# EAGLE board SOIC-24-panel-4x1 (EAGLE 5.00)
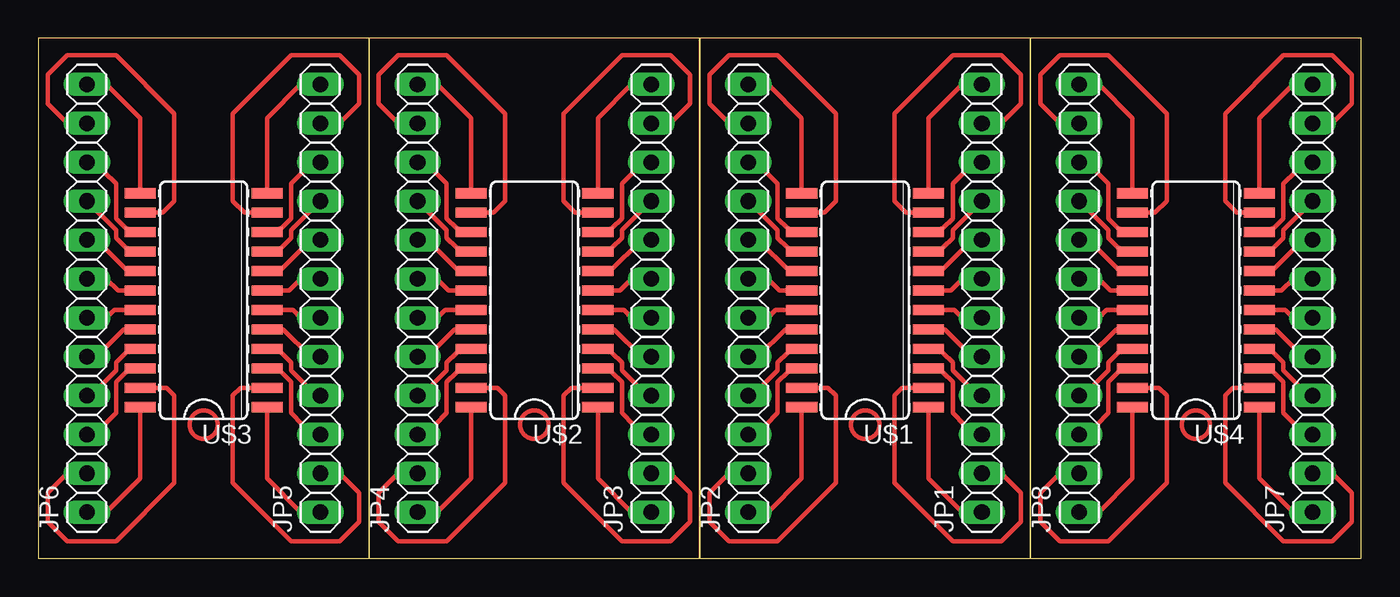
[diagram p0: board, top side]

Size 86.35 x 33.96 mm. Coordinates in mm from the lower left corner, seen from the top.
Outline: 64.76,0 64.76,33.96 43.18,33.96 43.18,0 64.76,0
Outline: 43.17,0 43.17,33.96 21.59,33.96 21.59,0 43.17,0
Outline: 21.58,0 21.58,33.96 0,33.96 0,0 21.58,0
Outline: 86.35,0 86.35,33.96 64.77,33.96 64.77,0 86.35,0
Copper layers (1*16): Top 0.035mm / dielectric 1.5mm / Bottom 0.035mm
Design rules "default": minimum track width 10mil, minimum drill 24mil, track to track 8mil, track to pad 8mil, pad to pad 8mil, via to via 8mil, smd to smd 8mil, copper to edge 40mil, drill to drill 8mil, minimum pad ring 10mil, minimum via ring 8mil, stop-mask expansion 4mil, vias tented up to drill 0mil, thermal gap 10mil

## Footprints (pad centres in the part's own frame; a part is rotated, then mirrored left to right if it is on the bottom)
1X12 = drill 1.016 long: 1 -13.97,0; 2 -11.43,0; 3 -8.89,0; 4 -6.35,0; 5 -3.81,0; 6 -1.27,0; 7 1.27,0; 8 3.81,0; 9 6.35,0; 10 8.89,0; 11 11.43,0; 12 13.97,0
SOIC-24 = smd 0.66 x 2.032: 1 -6.985,-4.14; 2 -5.715,-4.14; 3 -4.445,-4.14; 4 -3.175,-4.14; 5 -1.905,-4.14; 6 -0.635,-4.14; 7 0.635,-4.14; 8 1.905,-4.14; 9 3.175,-4.14; 10 4.445,-4.14; 11 5.715,-4.14; 12 6.985,-4.14; 13 6.985,4.14; 14 5.715,4.14; 15 4.445,4.14; 16 3.175,4.14; 17 1.905,4.14; 18 0.635,4.14; 19 -0.635,4.14; 20 -1.905,4.14; 21 -3.175,4.14; 22 -4.445,4.14; 23 -5.715,4.14; 24 -6.985,4.14

## Placement (x,y rotation side)
JP1  [1X12]  61.59,16.98 90 top
JP2  [1X12]  46.35,16.98 90 top
JP3  [1X12]  40,16.98 90 top
JP4  [1X12]  24.76,16.98 90 top
JP5  [1X12]  18.41,16.98 90 top
JP6  [1X12]  3.17,16.98 90 top
JP7  [1X12]  83.18,16.98 90 top
JP8  [1X12]  67.94,16.98 90 top
U$1  SOIC-24  [SOIC-24]  53.97,16.85 90 top
U$2  SOIC-24  [SOIC-24]  32.38,16.85 90 top
U$3  SOIC-24  [SOIC-24]  10.79,16.85 90 top
U$4  SOIC-24  [SOIC-24]  75.56,16.85 90 top

## Library data of the parts
JP1-JP8 = pinhead
U$1-U$4 = smd

## Nets
N$1: JP1.1 U$1.1
N$2: JP1.2 U$1.2
N$3: JP1.3 U$1.3
N$4: JP1.4 U$1.4
N$5: JP1.5 U$1.5
N$6: JP1.6 U$1.6
N$7: JP1.7 U$1.7
N$8: JP1.8 U$1.8
N$9: JP1.9 U$1.9
N$10: JP1.10 U$1.10
N$11: JP1.11 U$1.11
N$12: JP1.12 U$1.12
N$13: JP2.1 U$1.24
N$14: JP2.2 U$1.23
N$15: JP2.3 U$1.22
N$16: JP2.4 U$1.21
N$17: JP2.5 U$1.20
N$18: JP2.6 U$1.19
N$19: JP2.7 U$1.18
N$20: JP2.8 U$1.17
N$21: JP2.9 U$1.16
N$22: JP2.10 U$1.15
N$23: JP2.11 U$1.14
N$24: JP2.12 U$1.13
N$25: JP3.1 U$2.1
N$26: JP3.2 U$2.2
N$27: JP3.3 U$2.3
N$28: JP3.4 U$2.4
N$29: JP3.5 U$2.5
N$30: JP3.6 U$2.6
N$31: JP3.7 U$2.7
N$32: JP3.8 U$2.8
N$33: JP3.9 U$2.9
N$34: JP3.10 U$2.10
N$35: JP3.11 U$2.11
N$36: JP3.12 U$2.12
N$37: JP4.1 U$2.24
N$38: JP4.2 U$2.23
N$39: JP4.3 U$2.22
N$40: JP4.4 U$2.21
N$41: JP4.5 U$2.20
N$42: JP4.6 U$2.19
N$43: JP4.7 U$2.18
N$44: JP4.8 U$2.17
N$45: JP4.9 U$2.16
N$46: JP4.10 U$2.15
N$47: JP4.11 U$2.14
N$48: JP4.12 U$2.13
N$49: JP5.1 U$3.1
N$50: JP5.2 U$3.2
N$51: JP5.3 U$3.3
N$52: JP5.4 U$3.4
N$53: JP5.5 U$3.5
N$54: JP5.6 U$3.6
N$55: JP5.7 U$3.7
N$56: JP5.8 U$3.8
N$57: JP5.9 U$3.9
N$58: JP5.10 U$3.10
N$59: JP5.11 U$3.11
N$60: JP5.12 U$3.12
N$61: JP6.1 U$3.24
N$62: JP6.2 U$3.23
N$63: JP6.3 U$3.22
N$64: JP6.4 U$3.21
N$65: JP6.5 U$3.20
N$66: JP6.6 U$3.19
N$67: JP6.7 U$3.18
N$68: JP6.8 U$3.17
N$69: JP6.9 U$3.16
N$70: JP6.10 U$3.15
N$71: JP6.11 U$3.14
N$72: JP6.12 U$3.13
N$73: JP7.1 U$4.1
N$74: JP7.2 U$4.2
N$75: JP7.3 U$4.3
N$76: JP7.4 U$4.4
N$77: JP7.5 U$4.5
N$78: JP7.6 U$4.6
N$79: JP7.7 U$4.7
N$80: JP7.8 U$4.8
N$81: JP7.9 U$4.9
N$82: JP7.10 U$4.10
N$83: JP7.11 U$4.11
N$84: JP7.12 U$4.12
N$85: JP8.1 U$4.24
N$86: JP8.2 U$4.23
N$87: JP8.3 U$4.22
N$88: JP8.4 U$4.21
N$89: JP8.5 U$4.20
N$90: JP8.6 U$4.19
N$91: JP8.7 U$4.18
N$92: JP8.8 U$4.17
N$93: JP8.9 U$4.16
N$94: JP8.10 U$4.15
N$95: JP8.11 U$4.14
N$96: JP8.12 U$4.13

## Tracks (layer width: path | path; a pad name or v marks a point on that pad's centre or on a via)
N$1
  Top 0.305: U$1.1 58.11,5.22 60.32,3.01 JP1.1
N$2
  Top 0.305: U$1.2 56.38,11.14 55.88,10.63 55.88,4.92 59.69,1.1 62.86,1.1 64.13,2.38 64.13,4.28 62.86,5.55 JP1.2
N$3
  Top 0.254: 59.05,12.15 U$1.3
  Top 0.305: 59.05,12.15 59.69,11.52 59.69,9.49 60.45,8.73 JP1.3
N$4
  Top 0.254: 59.05,13.42 U$1.4
  Top 0.305: 59.05,13.42 59.69,12.79 59.69,12.28 60.7,11.27 JP1.4
N$5
  Top 0.305: U$1.5 59.18,14.95 60.96,13.17 JP1.5
N$6
  Top 0.305: U$1.6 59.81,16.22 60.32,15.71 JP1.6
N$7
  Top 0.305: U$1.7 59.56,17.49 60.32,18.25 JP1.7
N$8
  Top 0.305: 58.92,18.76 60.96,20.79 JP1.8
  Top 0.406: U$1.8 58.92,18.76
N$9
  Top 0.254: U$1.9 59.05,20.28
  Top 0.305: 59.05,20.28 59.69,20.92 59.69,21.42 JP1.9
N$10
  Top 0.254: 59.05,21.55 U$1.10
  Top 0.305: 59.05,21.55 59.69,22.19 59.69,24.47 60.45,25.23 JP1.10
N$11
  Top 0.305: U$1.11 56.64,22.57 55.88,23.33 55.88,29.04 59.69,32.85 62.86,32.85 64.13,31.58 64.13,29.68 62.86,28.41 JP1.11
N$12
  Top 0.305: U$1.12 58.11,28.74 60.32,30.95 JP1.12
N$13
  Top 0.305: U$1.24 49.83,5.22 47.62,3.01 JP2.1
N$14
  Top 0.305: U$1.23 51.56,11.14 52.07,10.63 52.07,4.92 48.26,1.1 45.08,1.1 43.81,2.38 43.81,4.28 45.08,5.55 JP2.2
N$15
  Top 0.254: U$1.22 48.89,12.15
  Top 0.305: 48.89,12.15 48.26,11.52 48.26,9.49 47.49,8.73 JP2.3
N$16
  Top 0.254: U$1.21 48.89,13.42
  Top 0.305: 48.89,13.42 48.26,12.79 48.26,12.28 47.24,11.27 JP2.4
N$17
  Top 0.305: U$1.20 48.76,14.95 46.98,13.17 JP2.5
N$18
  Top 0.305: U$1.19 48.13,16.22 47.62,15.71 JP2.6
N$19
  Top 0.305: U$1.18 48.38,17.49 47.62,18.25 JP2.7
N$20
  Top 0.305: U$1.17 49.02,18.76 46.98,20.79 JP2.8
N$21
  Top 0.254: U$1.16 48.89,20.28
  Top 0.305: 48.89,20.28 48.26,20.92 48.26,21.42 JP2.9
N$22
  Top 0.254: U$1.15 48.89,21.55
  Top 0.305: 48.89,21.55 48.26,22.19 48.26,24.47 47.49,25.23 JP2.10
N$23
  Top 0.305: U$1.14 51.3,22.57 52.07,23.33 52.07,29.04 48.26,32.85 45.08,32.85 43.81,31.58 43.81,29.68 45.08,28.41
  Top 0.406: 45.08,28.41 JP2.11
N$24
  Top 0.305: U$1.13 49.83,28.74 47.62,30.95 JP2.12
N$25
  Top 0.305: U$2.1 36.52,5.22 38.73,3.01 JP3.1
N$26
  Top 0.305: U$2.2 34.79,11.14 34.29,10.63 34.29,4.92 38.1,1.1 41.27,1.1 42.54,2.38 42.54,4.28 41.27,5.55 JP3.2
N$27
  Top 0.254: 37.46,12.15 U$2.3
  Top 0.305: 37.46,12.15 38.1,11.52 38.1,9.49 38.86,8.73 JP3.3
N$28
  Top 0.254: 37.46,13.42 U$2.4
  Top 0.305: 37.46,13.42 38.1,12.79 38.1,12.28 39.11,11.27 JP3.4
N$29
  Top 0.305: U$2.5 37.59,14.95 39.37,13.17 JP3.5
N$30
  Top 0.305: U$2.6 38.22,16.22 38.73,15.71 JP3.6
N$31
  Top 0.305: U$2.7 37.97,17.49 38.73,18.25 JP3.7
N$32
  Top 0.305: 37.33,18.76 39.37,20.79 JP3.8
  Top 0.406: U$2.8 37.33,18.76
N$33
  Top 0.254: U$2.9 37.46,20.28
  Top 0.305: 37.46,20.28 38.1,20.92 38.1,21.42 JP3.9
N$34
  Top 0.254: 37.46,21.55 U$2.10
  Top 0.305: 37.46,21.55 38.1,22.19 38.1,24.47 38.86,25.23 JP3.10
N$35
  Top 0.305: U$2.11 35.05,22.57 34.29,23.33 34.29,29.04 38.1,32.85 41.27,32.85 42.54,31.58 42.54,29.68 41.27,28.41 JP3.11
N$36
  Top 0.305: U$2.12 36.52,28.74 38.73,30.95 JP3.12
N$37
  Top 0.305: U$2.24 28.24,5.22 26.03,3.01 JP4.1
N$38
  Top 0.305: U$2.23 29.97,11.14 30.47,10.63 30.47,4.92 26.66,1.1 23.49,1.1 22.22,2.38 22.22,4.28 23.49,5.55 JP4.2
N$39
  Top 0.254: U$2.22 27.3,12.15
  Top 0.305: 27.3,12.15 26.66,11.52 26.66,9.49 25.9,8.73 JP4.3
N$40
  Top 0.254: U$2.21 27.3,13.42
  Top 0.305: 27.3,13.42 26.66,12.79 26.66,12.28 25.65,11.27 JP4.4
N$41
  Top 0.305: U$2.20 27.17,14.95 25.39,13.17 JP4.5
N$42
  Top 0.305: U$2.19 26.54,16.22 26.03,15.71 JP4.6
N$43
  Top 0.305: U$2.18 26.79,17.49 26.03,18.25 JP4.7
N$44
  Top 0.305: U$2.17 27.43,18.76 25.39,20.79 JP4.8
N$45
  Top 0.254: U$2.16 27.3,20.28
  Top 0.305: 27.3,20.28 26.66,20.92 26.66,21.42 JP4.9
N$46
  Top 0.254: U$2.15 27.3,21.55
  Top 0.305: 27.3,21.55 26.66,22.19 26.66,24.47 25.9,25.23 JP4.10
N$47
  Top 0.305: U$2.14 29.71,22.57 30.47,23.33 30.47,29.04 26.66,32.85 23.49,32.85 22.22,31.58 22.22,29.68 23.49,28.41
  Top 0.406: 23.49,28.41 JP4.11
N$48
  Top 0.305: U$2.13 28.24,28.74 26.03,30.95 JP4.12
N$49
  Top 0.305: U$3.1 14.93,5.22 17.14,3.01 JP5.1
N$50
  Top 0.305: U$3.2 13.2,11.14 12.7,10.63 12.7,4.92 16.5,1.1 19.68,1.1 20.95,2.38 20.95,4.28 19.68,5.55 JP5.2
N$51
  Top 0.254: 15.87,12.15 U$3.3
  Top 0.305: 15.87,12.15 16.5,11.52 16.5,9.49 17.27,8.73 JP5.3
N$52
  Top 0.254: 15.87,13.42 U$3.4
  Top 0.305: 15.87,13.42 16.5,12.79 16.5,12.28 17.52,11.27 JP5.4
N$53
  Top 0.305: U$3.5 16,14.95 17.77,13.17 JP5.5
N$54
  Top 0.305: U$3.6 16.63,16.22 17.14,15.71 JP5.6
N$55
  Top 0.305: U$3.7 16.38,17.49 17.14,18.25 JP5.7
N$56
  Top 0.305: 15.74,18.76 17.77,20.79 JP5.8
  Top 0.406: U$3.8 15.74,18.76
N$57
  Top 0.254: U$3.9 15.87,20.28
  Top 0.305: 15.87,20.28 16.5,20.92 16.5,21.42 JP5.9
N$58
  Top 0.254: 15.87,21.55 U$3.10
  Top 0.305: 15.87,21.55 16.5,22.19 16.5,24.47 17.27,25.23 JP5.10
N$59
  Top 0.305: U$3.11 13.46,22.57 12.7,23.33 12.7,29.04 16.5,32.85 19.68,32.85 20.95,31.58 20.95,29.68 19.68,28.41 JP5.11
N$60
  Top 0.305: U$3.12 14.93,28.74 17.14,30.95 JP5.12
N$61
  Top 0.305: U$3.24 6.65,5.22 4.44,3.01 JP6.1
N$62
  Top 0.305: U$3.23 8.38,11.14 8.89,10.63 8.89,4.92 5.08,1.1 1.9,1.1 0.63,2.38 0.63,4.28 1.9,5.55 JP6.2
N$63
  Top 0.254: U$3.22 5.71,12.15
  Top 0.305: 5.71,12.15 5.08,11.52 5.08,9.49 4.31,8.73 JP6.3
N$64
  Top 0.254: U$3.21 5.71,13.42
  Top 0.305: 5.71,13.42 5.08,12.79 5.08,12.28 4.06,11.27 JP6.4
N$65
  Top 0.305: U$3.20 5.58,14.95 3.8,13.17 JP6.5
N$66
  Top 0.305: U$3.19 4.95,16.22 4.44,15.71 JP6.6
N$67
  Top 0.305: U$3.18 5.2,17.49 4.44,18.25 JP6.7
N$68
  Top 0.305: U$3.17 5.84,18.76 3.8,20.79 JP6.8
N$69
  Top 0.254: U$3.16 5.71,20.28
  Top 0.305: 5.71,20.28 5.08,20.92 5.08,21.42 JP6.9
N$70
  Top 0.254: U$3.15 5.71,21.55
  Top 0.305: 5.71,21.55 5.08,22.19 5.08,24.47 4.31,25.23 JP6.10
N$71
  Top 0.305: U$3.14 8.12,22.57 8.89,23.33 8.89,29.04 5.08,32.85 1.9,32.85 0.63,31.58 0.63,29.68 1.9,28.41
  Top 0.406: 1.9,28.41 JP6.11
N$72
  Top 0.305: U$3.13 6.65,28.74 4.44,30.95 JP6.12
N$73
  Top 0.305: U$4.1 79.7,5.22 81.91,3.01 JP7.1
N$74
  Top 0.305: U$4.2 77.97,11.14 77.46,10.63 77.46,4.92 81.27,1.1 84.45,1.1 85.72,2.38 85.72,4.28 84.45,5.55 JP7.2
N$75
  Top 0.254: 80.64,12.15 U$4.3
  Top 0.305: 80.64,12.15 81.27,11.52 81.27,9.49 82.04,8.73 JP7.3
N$76
  Top 0.254: 80.64,13.42 U$4.4
  Top 0.305: 80.64,13.42 81.27,12.79 81.27,12.28 82.29,11.27 JP7.4
N$77
  Top 0.305: U$4.5 80.77,14.95 82.55,13.17 JP7.5
N$78
  Top 0.305: U$4.6 81.4,16.22 81.91,15.71 JP7.6
N$79
  Top 0.305: U$4.7 81.15,17.49 81.91,18.25 JP7.7
N$80
  Top 0.305: 80.51,18.76 82.55,20.79 JP7.8
  Top 0.406: U$4.8 80.51,18.76
N$81
  Top 0.254: U$4.9 80.64,20.28
  Top 0.305: 80.64,20.28 81.27,20.92 81.27,21.42 JP7.9
N$82
  Top 0.254: 80.64,21.55 U$4.10
  Top 0.305: 80.64,21.55 81.27,22.19 81.27,24.47 82.04,25.23 JP7.10
N$83
  Top 0.305: U$4.11 78.23,22.57 77.46,23.33 77.46,29.04 81.27,32.85 84.45,32.85 85.72,31.58 85.72,29.68 84.45,28.41 JP7.11
N$84
  Top 0.305: U$4.12 79.7,28.74 81.91,30.95 JP7.12
N$85
  Top 0.305: U$4.24 71.42,5.22 69.21,3.01 JP8.1
N$86
  Top 0.305: U$4.23 73.15,11.14 73.66,10.63 73.66,4.92 69.84,1.1 66.67,1.1 65.4,2.38 65.4,4.28 66.67,5.55 JP8.2
N$87
  Top 0.254: U$4.22 70.48,12.15
  Top 0.305: 70.48,12.15 69.84,11.52 69.84,9.49 69.08,8.73 JP8.3
N$88
  Top 0.254: U$4.21 70.48,13.42
  Top 0.305: 70.48,13.42 69.84,12.79 69.84,12.28 68.83,11.27 JP8.4
N$89
  Top 0.305: U$4.20 70.35,14.95 68.57,13.17 JP8.5
N$90
  Top 0.305: U$4.19 69.72,16.22 69.21,15.71 JP8.6
N$91
  Top 0.305: U$4.18 69.97,17.49 69.21,18.25 JP8.7
N$92
  Top 0.305: U$4.17 70.61,18.76 68.57,20.79 JP8.8
N$93
  Top 0.254: U$4.16 70.48,20.28
  Top 0.305: 70.48,20.28 69.84,20.92 69.84,21.42 JP8.9
N$94
  Top 0.254: U$4.15 70.48,21.55
  Top 0.305: 70.48,21.55 69.84,22.19 69.84,24.47 69.08,25.23 JP8.10
N$95
  Top 0.305: U$4.14 72.89,22.57 73.66,23.33 73.66,29.04 69.84,32.85 66.67,32.85 65.4,31.58 65.4,29.68 66.67,28.41
  Top 0.406: 66.67,28.41 JP8.11
N$96
  Top 0.305: U$4.13 71.42,28.74 69.21,30.95 JP8.12
(copper drawn outside any net)
  shapes: Top circle x4

## Text on the board
_tNames: JP2 | U$1 | JP1